# EAGLE board RT5350F_OLinuXino_Rev-A (EAGLE 4.16), part 1 of 2
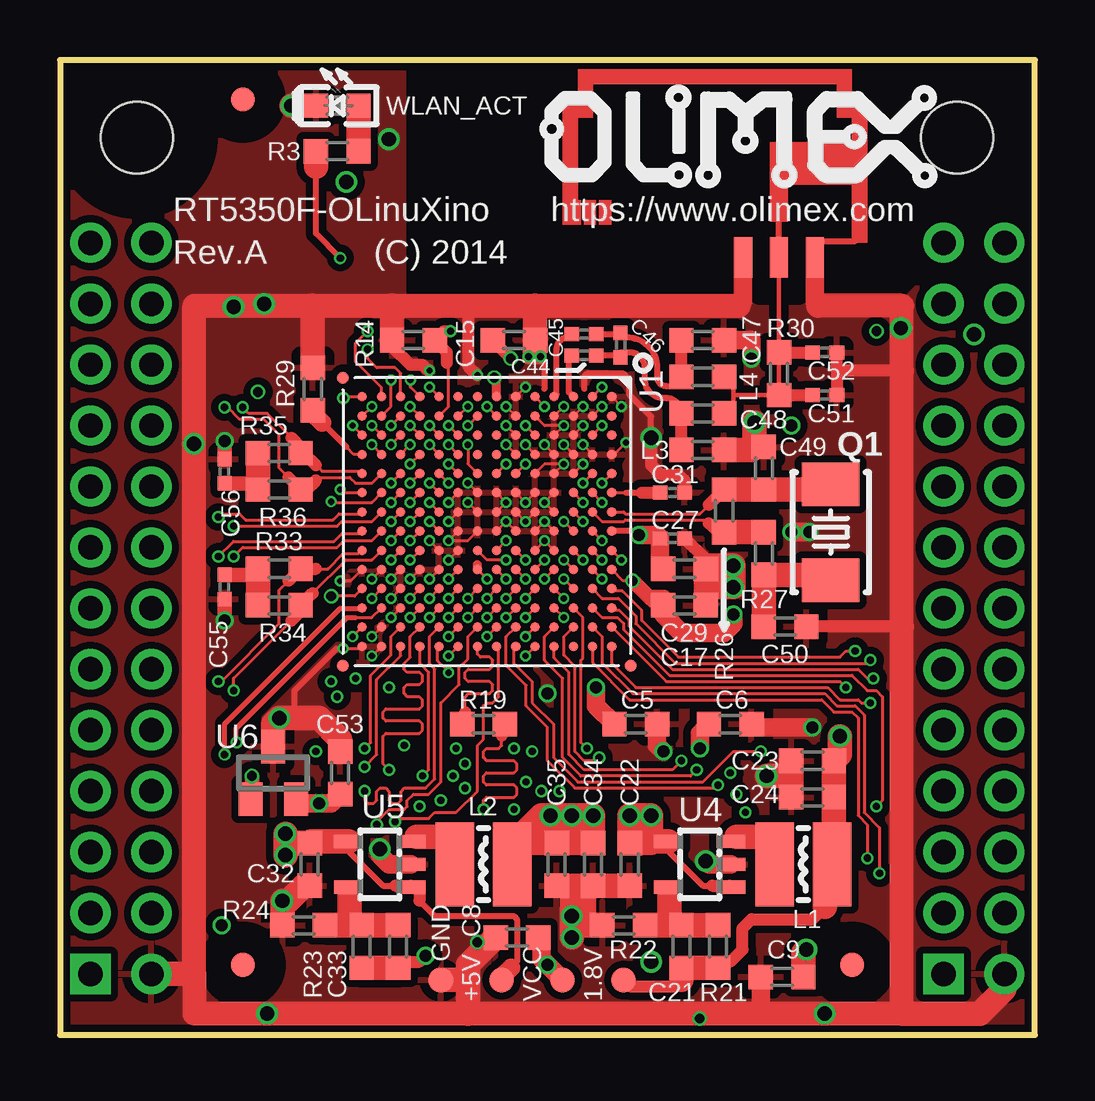
[diagram p0: board, top side]
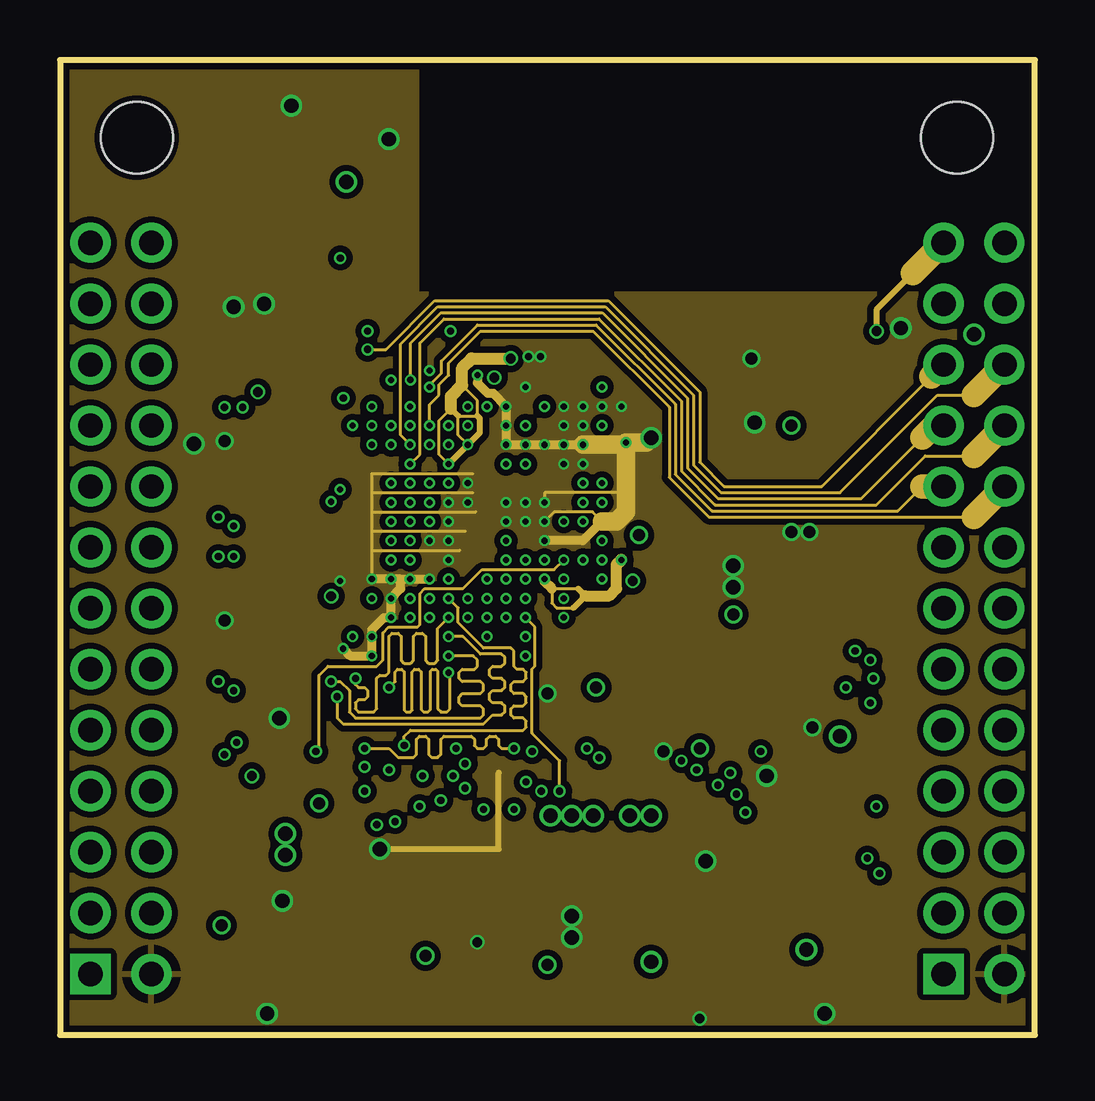
[diagram p1: board, inner layer GND]
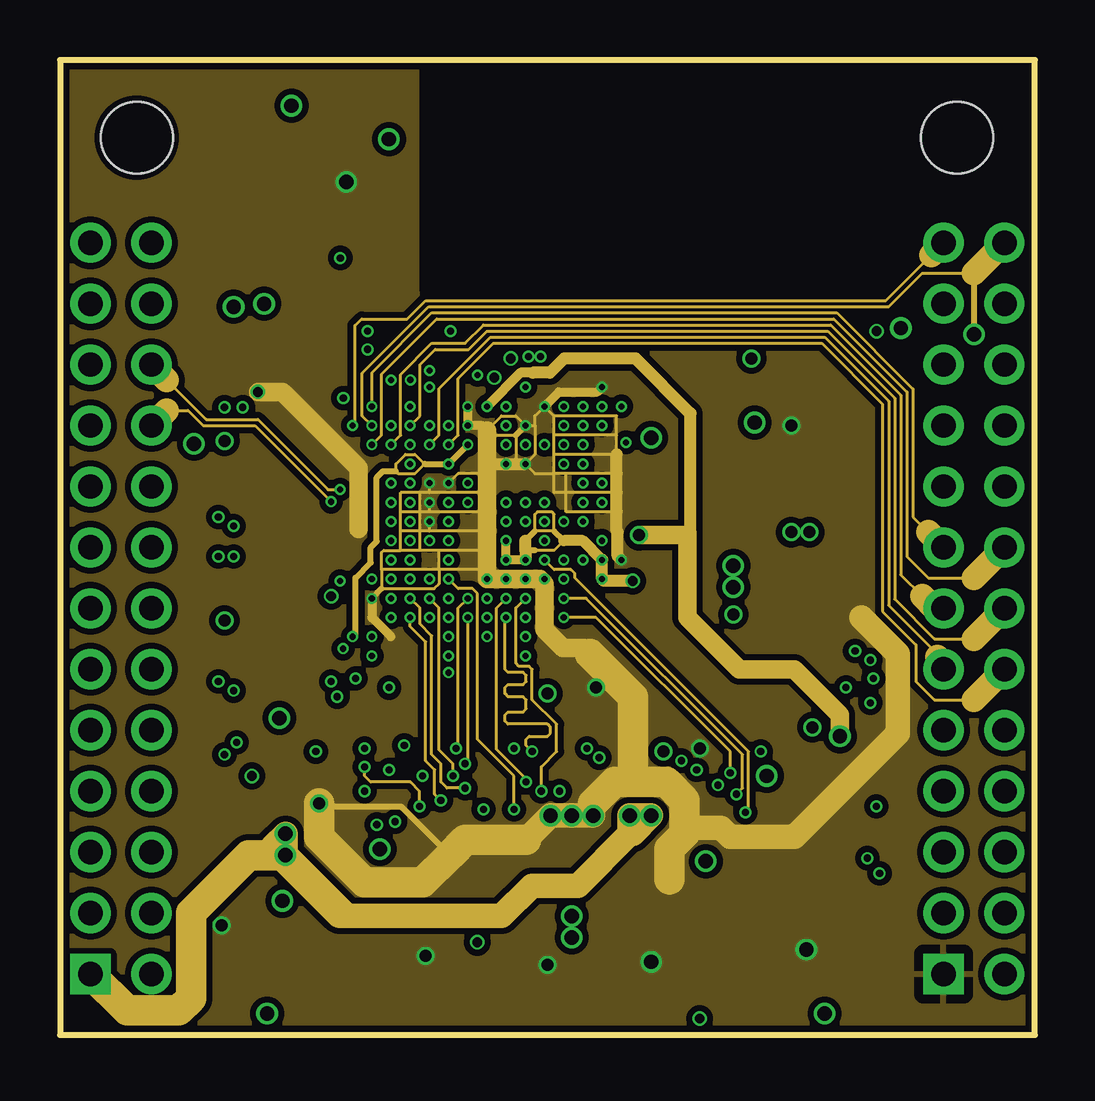
[diagram p2: board, inner layer PWR]
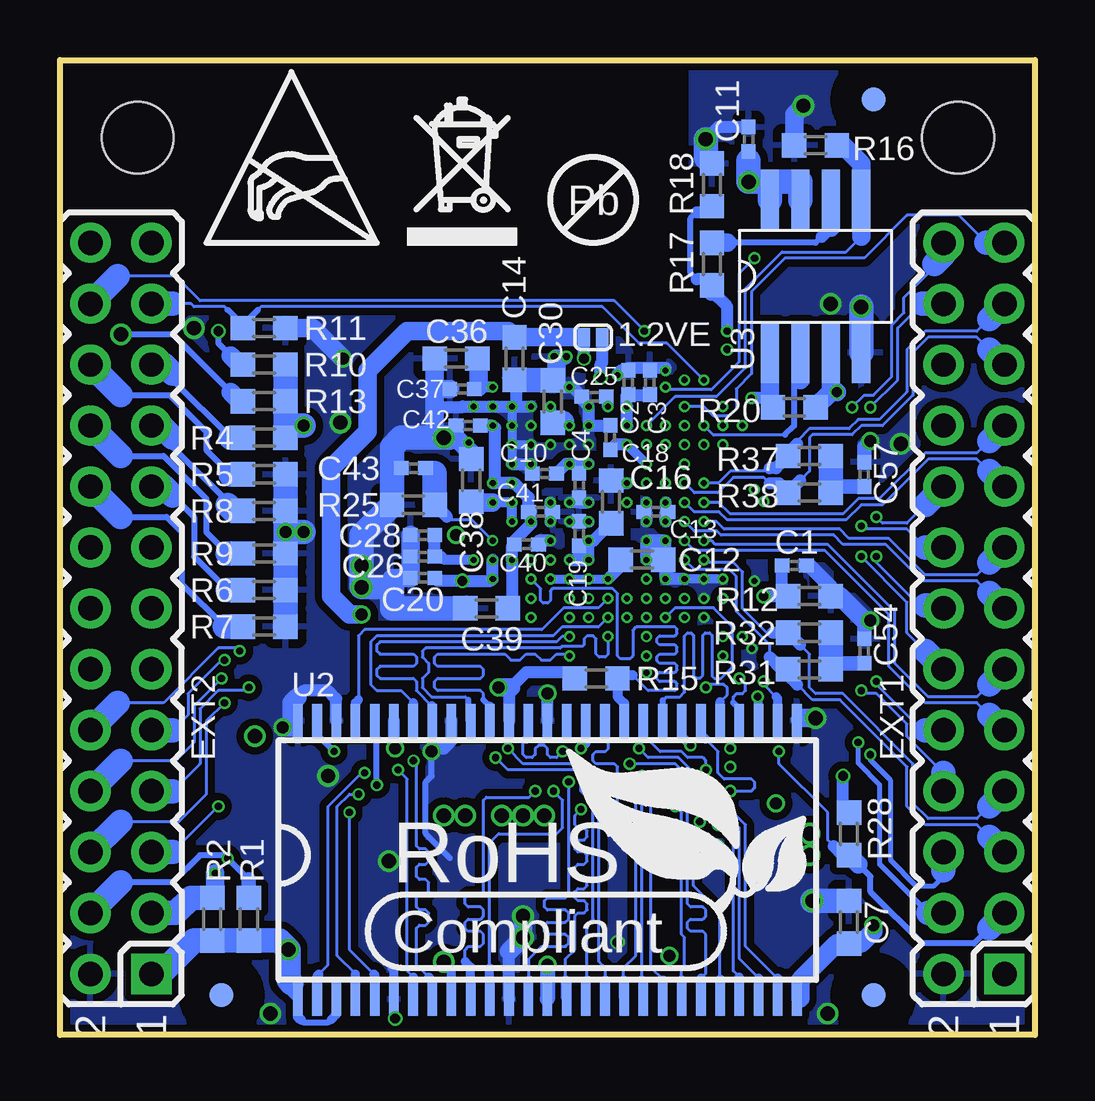
[diagram p3: board, bottom side, seen from below]

Size 40.64 x 40.64 mm. Coordinates in mm from the lower left corner, seen from the top.
Outline: 0,0 40.64,0 40.64,40.64 0,40.64 0,0
Copper layers (1+2*15+16): Top 0.035mm / dielectric 0.127mm / GND 0.035mm / dielectric 1.1mm / PWR 0.035mm / dielectric 0.127mm / Bottom 0.035mm
Design rules "default": minimum track width 4mil, minimum drill 0.25mm, track to track 5mil, track to pad 5mil, pad to pad 5mil, via to via 5mil, smd to smd 1mil, copper to edge 10mil, drill to drill 8mil, minimum pad ring 6mil, minimum via ring 4mil, stop-mask expansion 4mil, vias tented up to drill 28mil, thermal gap 15mil
Holes 3 mm at 3.2,37.4 37.4,37.4
tRestrict: area 34.4,34.4 to 40.4,40.4; area 0.2,34.4 to 6.2,40.4; 5 lines
bRestrict: area 0.2,34.4 to 6.2,40.4; area 34.4,34.4 to 40.4,40.4; 6 lines

## Footprints (pad centres in the part's own frame; a part is rotated, then mirrored left to right if it is on the bottom)
SJ_1_SMALLER = smd 0.508 x 0.762: 1 -0.381,0; 2 0.381,0
TESTPAD_40-ROUND = smd 1.016 x 1.016: 1 0,0
WIFI_RTL8188_ANT = smd 1.676 x 0.762: ANT -3.404,0; GND1 -3.404,1.499; GND2 -3.404,-1.499
C0402_TI = smd 0.61 x 0.584: 1 -0.508,0; 2 0.508,0
C0603_DWS@1 = smd 1.016 x 1.016: 1 -0.889,0; 2 0.889,0
C0603_DWS = smd 1.016 x 1.016: 1 -0.889,0; 2 0.889,0
HN2X13-MALE = drill 1.016 pad 1.676 square: 1 -15.24,-1.27 | drill 1.016 pad 1.676 round: 2 -15.24,1.27; 3 -12.7,-1.27; 4 -12.7,1.27; 5 -10.16,-1.27; 6 -10.16,1.27; 7 -7.62,-1.27; 8 -7.62,1.27; 9 -5.08,-1.27; 10 -5.08,1.27; 11 -2.54,-1.27; 12 -2.54,1.27; 13 0,-1.27; 14 0,1.27; 15 2.54,-1.27; 16 2.54,1.27; 17 5.08,-1.27; 18 5.08,1.27; 19 7.62,-1.27; 20 7.62,1.27; 21 10.16,-1.27; 22 10.16,1.27; 23 12.7,-1.27; 24 12.7,1.27; 25 15.24,-1.27; 26 15.24,1.27
FIDUCIAL-1X3 = smd 1 x 1: 1 0,0
CD32 = smd 1.6 x 3.5: 1 -1.2,0; 2 1.2,0
L0603_5MIL_DWS = smd 1.016 x 1.016: 1 -0.889,0; 2 0.889,0
HCX-4S = smd 1.8 x 2.4: 1 -2,0; 2 2,0
R0603_5MIL_DWS = smd 1.016 x 1.016: 1 -0.889,0; 2 0.889,0
TFBGA196B = smd 0.4 x 0.4: A1 -5.2,-5.2; A2 -5.2,-4.4; A3 -5.2,-3.6; A4 -5.2,-2.8; A5 -5.2,-2; A6 -5.2,-1.2; A7 -5.2,-0.4; A8 -5.2,0.4; A9 -5.2,1.2; A10 -5.2,2; A11 -5.2,2.8; A12 -5.2,3.6; A13 -5.2,4.4; A14 -5.2,5.2; B1 -4.4,-5.2; B2 -4.4,-4.4; B3 -4.4,-3.6; B4 -4.4,-2.8; B5 -4.4,-2; B6 -4.4,-1.2; B7 -4.4,-0.4; B8 -4.4,0.4; B9 -4.4,1.2; B10 -4.4,2; B11 -4.4,2.8; B12 -4.4,3.6; B13 -4.4,4.4; B14 -4.4,5.2; C1 -3.6,-5.2; C2 -3.6,-4.4; C3 -3.6,-3.6; C4 -3.6,-2.8; C5 -3.6,-2; C6 -3.6,-1.2; C7 -3.6,-0.4; C8 -3.6,0.4; C9 -3.6,1.2; C10 -3.6,2; C11 -3.6,2.8; C12 -3.6,3.6; C13 -3.6,4.4; C14 -3.6,5.2; D1 -2.8,-5.2; D2 -2.8,-4.4; D3 -2.8,-3.6; D4 -2.8,-2.8; D5 -2.8,-2; D6 -2.8,-1.2; D7 -2.8,-0.4; D8 -2.8,0.4; D9 -2.8,1.2; D10 -2.8,2; D11 -2.8,2.8; D12 -2.8,3.6; D13 -2.8,4.4; D14 -2.8,5.2; E1 -2,-5.2; E2 -2,-4.4; E3 -2,-3.6; E4 -2,-2.8; E5 -2,-2; E6 -2,-1.2; E7 -2,-0.4; E8 -2,0.4; E9 -2,1.2; E10 -2,2; E11 -2,2.8; E12 -2,3.6; E13 -2,4.4; E14 -2,5.2; F1 -1.2,-5.2; F2 -1.2,-4.4; F3 -1.2,-3.6; F4 -1.2,-2.8; F5 -1.2,-2; F6 -1.2,-1.2; F7 -1.2,-0.4; F8 -1.2,0.4; F9 -1.2,1.2; F10 -1.2,2; F11 -1.2,2.8; F12 -1.2,3.6; F13 -1.2,4.4; F14 -1.2,5.2; G1 -0.4,-5.2; G2 -0.4,-4.4; G3 -0.4,-3.6; G4 -0.4,-2.8; G5 -0.4,-2; G6 -0.4,-1.2; G7 -0.4,-0.4; G8 -0.4,0.4; G9 -0.4,1.2; G10 -0.4,2; G11 -0.4,2.8; G12 -0.4,3.6; G13 -0.4,4.4; G14 -0.4,5.2; H1 0.4,-5.2; H2 0.4,-4.4; H3 0.4,-3.6; H4 0.4,-2.8; H5 0.4,-2; H6 0.4,-1.2; H7 0.4,-0.4; H8 0.4,0.4; H9 0.4,1.2; H10 0.4,2; H11 0.4,2.8; H12 0.4,3.6; H13 0.4,4.4; H14 0.4,5.2; J1 1.2,-5.2; J2 1.2,-4.4; J3 1.2,-3.6; J4 1.2,-2.8; J5 1.2,-2; J6 1.2,-1.2; J7 1.2,-0.4; J8 1.2,0.4; J9 1.2,1.2; J10 1.2,2; J11 1.2,2.8; J12 1.2,3.6; J13 1.2,4.4; J14 1.2,5.2; K1 2,-5.2; K2 2,-4.4; K3 2,-3.6; K4 2,-2.8; K5 2,-2; K6 2,-1.2; K7 2,-0.4; K8 2,0.4; K9 2,1.2; K10 2,2; K11 2,2.8; K12 2,3.6; K13 2,4.4; K14 2,5.2; L1 2.8,-5.2; L2 2.8,-4.4; L3 2.8,-3.6; L4 2.8,-2.8; L5 2.8,-2; L6 2.8,-1.2; L7 2.8,-0.4; L8 2.8,0.4; L9 2.8,1.2; L10 2.8,2; L11 2.8,2.8; L12 2.8,3.6; L13 2.8,4.4; L14 2.8,5.2; M1 3.6,-5.2; M2 3.6,-4.4; M3 3.6,-3.6; M4 3.6,-2.8; M5 3.6,-2; M6 3.6,-1.2; M7 3.6,-0.4; M8 3.6,0.4; M9 3.6,1.2; M10 3.6,2; M11 3.6,2.8; M12 3.6,3.6; M13 3.6,4.4; M14 3.6,5.2; N1 4.4,-5.2; N2 4.4,-4.4; N3 4.4,-3.6; N4 4.4,-2.8; N5 4.4,-2; N6 4.4,-1.2; N7 4.4,-0.4; N8 4.4,0.4; N9 4.4,1.2; N10 4.4,2; N11 4.4,2.8; N12 4.4,3.6; N13 4.4,4.4; N14 4.4,5.2; P1 5.2,-5.2; P2 5.2,-4.4; P3 5.2,-3.6; P4 5.2,-2.8; P5 5.2,-2; P6 5.2,-1.2; P7 5.2,-0.4; P8 5.2,0.4; P9 5.2,1.2; P10 5.2,2; P11 5.2,2.8; P12 5.2,3.6; P13 5.2,4.4; P14 5.2,5.2 | smd 0.5 x 0.5: FID1 6,-6; FID2 -6,6; FID3 6,6
54TSOPII = smd 0.4 x 1.4: 1 -10.4,-6; 2 -9.6,-6; 3 -8.8,-6; 4 -8,-6; 5 -7.2,-6; 6 -6.4,-6; 7 -5.6,-6; 8 -4.8,-6; 9 -4,-6; 10 -3.2,-6; 11 -2.4,-6; 12 -1.6,-6; 13 -0.8,-6; 14 0,-6; 15 0.8,-6; 16 1.6,-6; 17 2.4,-6; 18 3.2,-6; 19 4,-6; 20 4.8,-6; 21 5.6,-6; 22 6.4,-6; 23 7.2,-6; 24 8,-6; 25 8.8,-6; 26 9.6,-6; 27 10.4,-6; 28 10.4,5.6; 29 9.6,5.6; 30 8.8,5.6; 31 8,5.6; 32 7.2,5.6; 33 6.4,5.6; 34 5.6,5.6; 35 4.8,5.6; 36 4,5.6; 37 3.2,5.6; 38 2.4,5.6; 39 1.6,5.6; 40 0.8,5.6; 41 0,5.6; 42 -0.8,5.6; 43 -1.6,5.6; 44 -2.4,5.6; 45 -3.2,5.6; 46 -4,5.6; 47 -4.8,5.6; 48 -5.6,5.6; 49 -6.4,5.6; 50 -7.2,5.6; 51 -8,5.6; 52 -8.8,5.6; 53 -9.6,5.6; 54 -10.4,5.6
SO8_ATMEL_FLASH = smd 0.762 x 2.54: 1 -1.905,-3.175; 2 -0.635,-3.175; 3 0.635,-3.175; 4 1.905,-3.175; 5 1.905,3.175; 6 0.635,3.175; 7 -0.635,3.175; 8 -1.905,3.175
SOT23-5 = smd 1.2 x 0.55: 1 1.3,-0.95; 2 1.3,0; 3 1.3,0.95; 4 -1.3,0.95; 5 -1.3,-0.95
SOT23 = smd 1 x 1.4: 1 -0.95,-1.1; 2 0.95,-1.1; 3 0,1.1
LED-0603 = smd 1.016 x 1.016: A 0.889,0; C -0.889,0

## Placement (x,y rotation side)
1.2VE  Close  [SJ_1_SMALLER]  18.41,29.08 0 bottom
1.8V  TESTPADTESTPAD_40-ROUND  [TESTPAD_40-ROUND]  23.5,2.29 270 top
+5V  TESTPADTESTPAD_40-ROUND  [TESTPAD_40-ROUND]  18.41,2.29 180 top
ANT  WIFI_RTL8188_ANTENNA  [WIFI_RTL8188_ANT]  29.97,35.81 90 top
C1  100nF  [C0402_TI]  10.03,19.57 0 bottom
C2  100nF  [C0402_TI]  16.95,27.2 90 bottom
C3  100nF  [C0402_TI]  16.05,27.2 90 bottom
C4  100nF  [C0402_TI]  19,22.9 270 bottom
C5  100nF  [C0603_DWS@1]  24,12.95 0 top
C6  100nF  [C0603_DWS@1]  27.94,12.95 0 top
C7  100nF  [C0603_DWS@1]  7.75,4.7 90 bottom
C8  100nF  [C0603_DWS@1]  19.05,4.06 180 top
C9  22uF/6.3V  [C0603_DWS@1]  30.1,2.41 180 top
C10  100nF  [C0402_TI]  20.45,23.4 180 bottom
C11  NA(100nF)  [C0402_TI]  11.94,37.34 90 bottom
C12  1uF  [C0603_DWS@1]  16.38,19.81 0 bottom
C13  100nF  [C0402_TI]  15.8,21.8 180 bottom
C14  1uF  [C0603_DWS]  21.69,28.19 270 bottom
C15  1uF  [C0603_DWS@1]  18.92,28.96 0 top
C16  1uF  [C0603_DWS@1]  17.66,22.22 90 bottom
C17  1uF  [C0603_DWS@1]  26.04,17.91 0 top
C18  100nF  [C0402_TI]  17.7,24.9 90 bottom
C19  100nF  [C0402_TI]  19,20.9 90 bottom
C20  100nF  [C0402_TI]  25.53,19.05 180 bottom
C21  22pF  [C0603_DWS@1]  25.91,3.68 90 top
C22  22uF/6.3V  [C0603_DWS@1]  23.75,7.11 270 top
C23  22uF/6.3V  [C0603_DWS@1]  31.37,11.43 180 top
C24  22uF/6.3V  [C0603_DWS@1]  31.37,9.91 180 top
C25  100nF  [C0402_TI]  18.38,26.6 180 bottom
C26  100nF  [C0402_TI]  25.53,19.94 180 bottom
C27  100nF  [C0402_TI]  25.53,20.7 0 top
C28  10pF  [C0402_TI]  25.53,20.83 180 bottom
C29  1uF  [C0603_DWS@1]  26.04,19.43 0 top
C30  1uF  [C0603_DWS@1]  20.1,26.4 90 bottom
C31  22nF  [C0402_TI]  25.53,22.61 0 top
C32  22uF/6.3V  [C0603_DWS@1]  10.41,7.11 270 top
C33  22pF  [C0603_DWS@1]  14.1,3.68 90 top
C34  22uF/6.3V  [C0603_DWS@1]  22.23,7.11 270 top
C35  22uF/6.3V  [C0603_DWS@1]  20.7,7.11 270 top
C36  1uF  [C0603_DWS@1]  24.13,28.19 180 bottom
C37  10pF  [C0402_TI]  23.88,26.92 180 bottom
C38  1uF  [C0603_DWS@1]  23.5,23.11 90 bottom
C39  1uF  [C0603_DWS@1]  22.86,17.78 180 bottom
C40  100pF  [C0402_TI]  21.2,20.45 0 bottom
C41  10pF  [C0402_TI]  20.6,21.8 0 bottom
C42  100nF  [C0402_TI]  23.62,25.4 180 bottom
C43  100pF  [C0402_TI]  25.91,23.62 180 bottom
C44  2.7pF  [C0402_TI]  21.84,28.32 0 top
C45  2.7pF  [C0402_TI]  21.84,29.21 0 top
C46  1.5pF  [C0402_TI]  23.37,28.75 270 top
C47  1.2pF  [C0603_DWS@1]  26.8,28.96 0 top
C48  1.2pF  [C0603_DWS@1]  26.8,25.91 0 top
C49  NA(27pF)  [C0603_DWS@1]  29.34,23.62 90 top
C50  27pF  [C0603_DWS@1]  30.23,17.02 0 top
C51  NA  [C0402_TI]  31.88,26.67 0 top
C52  NA  [C0402_TI]  31.88,28.45 0 top
C53  100nF  [C0603_DWS@1]  11.68,10.92 90 top
C54  100nF  [C0402_TI]  7.11,16 90 bottom
C55  100nF  [C0402_TI]  6.86,18.67 270 top
C56  100nF  [C0402_TI]  6.86,23.5 90 top
C57  100nF  [C0402_TI]  7.11,23.37 90 bottom
EXT1  HN2x13  [HN2X13-MALE]  2.54,17.78 90 bottom
EXT2  HN2x13  [HN2X13-MALE]  38.1,17.78 90 bottom
FID1  FIDUCIAL  [FIDUCIAL-1X3]  7.62,38.99 90 top
FID2  FIDUCIAL  [FIDUCIAL-1X3]  33.02,2.92 90 top
FID3  FIDUCIAL  [FIDUCIAL-1X3]  7.62,2.92 90 top
FID4  FIDUCIAL  [FIDUCIAL-1X3]  6.73,38.99 270 bottom
FID5  FIDUCIAL  [FIDUCIAL-1X3]  33.91,1.65 270 bottom
FID6  FIDUCIAL  [FIDUCIAL-1X3]  6.73,1.65 270 bottom
GND  TESTPADTESTPAD_40-ROUND  [TESTPAD_40-ROUND]  15.88,2.29 270 top
L1  2.2uH/1.5A/DCR<0.1R/CD32  [CD32]  30.99,7.11 0 top
L2  2.2uH/1.5A/DCR<0.1R/CD32  [CD32]  17.65,7.11 0 top
L3  2.2nH  [L0603_5MIL_DWS]  26.8,24.38 0 top
L4  2.7nH  [L0603_5MIL_DWS]  26.8,27.43 0 top
Q1  E4SB20.000F20E15(20MHz/20pF/20ppm/5x3.2mm)  [HCX-4S]  32.13,20.95 90 top
R1  2.2k  [R0603_5MIL_DWS]  32.77,4.83 270 bottom
R2  2.2k  [R0603_5MIL_DWS]  34.29,4.83 270 bottom
R3  2.2k  [R0603_5MIL_DWS]  11.56,36.83 180 top
R4  4.7k  [R0603_5MIL_DWS]  32.13,24.89 0 bottom
R5  4.7k  [R0603_5MIL_DWS]  32.13,23.37 0 bottom
R6  4.7k  [R0603_5MIL_DWS]  32.13,18.54 0 bottom
R7  4.7k  [R0603_5MIL_DWS]  32.13,17.02 0 bottom
R8  4.7k  [R0603_5MIL_DWS]  32.13,21.84 0 bottom
R9  4.7k  [R0603_5MIL_DWS]  32.13,20.07 0 bottom
R10  4.7k  [R0603_5MIL_DWS]  32.13,27.94 0 bottom
R11  4.7k  [R0603_5MIL_DWS]  32.13,29.46 0 bottom
R12  8.2k/1%  [R0603_5MIL_DWS]  9.4,18.29 0 bottom
R13  4.7k  [R0603_5MIL_DWS]  32.13,26.42 0 bottom
R14  4.7k  [R0603_5MIL_DWS]  14.73,28.96 180 top
R15  4.7k  [R0603_5MIL_DWS]  18.29,14.86 0 bottom
R16  4.7k  [R0603_5MIL_DWS]  9.14,37.08 0 bottom
R17  22R  [R0603_5MIL_DWS]  13.46,32.13 270 bottom
R18  4.7k  [R0603_5MIL_DWS]  13.46,35.43 90 bottom
R19  22R  [R0603_5MIL_DWS]  17.65,12.95 0 top
R20  NA(47k)  [R0603_5MIL_DWS]  10.03,26.16 180 bottom
R21  5.62k/1%  [R0603_5MIL_DWS]  27.43,3.68 90 top
R22  2.74k/1%  [R0603_5MIL_DWS]  23.5,4.57 180 top
R23  4.99k/1%  [R0603_5MIL_DWS]  12.57,3.68 90 top
R24  1.1k/1%  [R0603_5MIL_DWS]  10.16,4.57 180 top
R25  12k/1%  [R0603_5MIL_DWS]  25.91,22.1 0 bottom
R26  NA(1M)  [R0603_5MIL_DWS]  27.69,21.84 270 top
R27  330R  [R0603_5MIL_DWS]  29.34,20.07 270 top
R28  22R  [R0603_5MIL_DWS]  7.75,8.38 90 bottom
R29  9.1k/1%  [R0603_5MIL_DWS]  10.54,26.92 90 top
R30  0R(Board_Mounted)  [R0603_5MIL_DWS]  29.97,27.56 270 top
R31  49.9/1%  [R0603_5MIL_DWS]  9.4,15.24 0 bottom
R32  49.9/1%  [R0603_5MIL_DWS]  9.4,16.76 0 bottom
R33  49.9/1%  [R0603_5MIL_DWS]  9.14,19.43 180 top
R34  49.9/1%  [R0603_5MIL_DWS]  9.14,17.91 180 top
R35  49.9/1%  [R0603_5MIL_DWS]  9.14,24.26 180 top
R36  49.9/1%  [R0603_5MIL_DWS]  9.14,22.73 180 top
R37  49.9/1%  [R0603_5MIL_DWS]  9.4,24.13 0 bottom
R38  49.9/1%  [R0603_5MIL_DWS]  9.4,22.61 0 bottom
U1  RT5350  [TFBGA196B]  17.8,21.4 180 top
U2  K4S561632C-TC/L75  [54TSOPII]  20.32,7.49 0 bottom
U3  EN25Q64-104HIP  [SO8_ATMEL_FLASH]  9.14,31.62 0 bottom
U4  SY8009AAAC(SOT23-5)  [SOT23-5]  26.67,7.11 0 top
U5  SY8009AAAC(SOT23-5)  [SOT23-5]  13.34,7.11 0 top
U6  MCP130T-300I/TT  [SOT23]  8.89,10.92 0 top
U$3  [PB_SMALL]  18.41,34.8 0 bottom
U$8  [RECYCLE_BIN1/8]  26.16,32.89 0 bottom
U$9  [ROHS]  26.8,3.43 0 bottom
U$10  [OLIMEX1_V]  37.72,35.18 0 top
U$11  [ESD_SYMBOL]  34.54,33.02 0 bottom
VCC  TESTPADTESTPAD_40-ROUND  [TESTPAD_40-ROUND]  20.95,2.29 270 top
WLAN_ACT  LED/Yellow/0603  [LED-0603]  11.56,38.73 0 top

## Library data of the parts
1.2VE = jumper
1.8V +5V GND U6 VCC = gogo
ANT L1 L2 = OLIMEX_DISCRET
C1-C57 L3 L4 R1-R38 = rcl
EXT1 EXT2 = con-harting-ml
FID1-FID6 = SparkFunEagle-6-6-07
Q1 = crystal
U1 U3-U5 = OLIMEX_IC
U2 = SIRRUS
U$3 U$8-U$11 = olimex_logo1
WLAN_ACT = DOUBLE-SIDE

## Nets
+5V: +5V.1 C22.1 C32.1 EXT1.1 U4.1 U4.4 U5.1 U5.4
A0: U1.G14 U2.23
A1: U1.H13 U2.24
A2: U1.H12 U2.25
A3: U1.H11 U2.26
A4: U1.J14 U2.29
A5: U1.J13 U2.30
A6: U1.J12 U2.31
A7: U1.K14 U2.32
A8: U1.K13 U2.33
A9: U1.J11 U2.34
A10: U1.L14 U2.22
A11: U1.K12 U2.35
A12: U1.L13 U2.36
BA0: U1.L12 U2.20
BA1: U1.M14 U2.21
CAS: U1.C12 U2.17
CS: U1.K11 U2.19
CTS_N: EXT2.11 U1.K4
D0: U1.E10 U2.5
D1: U1.D11 U2.4
D2: U1.D12 U2.2
D3: U1.D13 U2.7
D4: U1.D14 U2.8
D5: U1.E11 U2.11
D6: U1.F11 U2.13
D7: U1.E12 U2.10
D8: U1.F12 U2.42
D9: U1.E13 U2.47
D10: U1.E14 U2.44
D11: U1.G11 U2.51
D12: U1.G12 U2.48
D13: U1.F13 U2.50
D14: U1.G13 U2.45
D15: U1.F14 U2.53
DCD_N: EXT2.12 U1.J4
DQM0: U1.J10 U2.15
DQM1: U1.M13 U2.39
DSR_N: EXT2.14 U1.L3
DTR_N: EXT2.16 U1.N4
EJTAG_TCK: EXT2.8 U1.A12
EJTAG_TDI: EXT2.6 U1.A14
EJTAG_TDO: EXT2.9 U1.B11
EJTAG_TMS: EXT2.7 U1.A13
EJTAG_TRSTN: EXT2.10 U1.A11
EXT_LDO_1P2: U1.H3
GND: ANT.GND1 ANT.GND2 C1.2 C2.2 C3.2 C4.2 C5.2 C6.2 C7.2 C8.2 C9.2 C10.2 C11.2 C12.2 C13.2 C14.2 C15.2 C16.2 C17.2 C18.2 C19.2 C20.2 C22.2 C23.2 C24.2 C25.2 C26.2 C27.2 C28.2 C29.2 C30.2 C31.2 C32.2 C34.2 C35.2 C36.2 C37.2 C38.2 C39.2 C40.2 C41.2 C42.2 C43.2 C47.2 C49.2 C50.2 C51.2 C52.2 C53.2 C54.2 C55.2 C56.2 C57.2 EXT1.2 EXT2.2 GND.1 L3.2 R5.2 R6.2 R7.2 R8.2 R9.2 R11.2 R12.2 R14.2 R16.1 R18.2 R22.2 R24.2 R25.1 R29.2 U1.A1 U1.A4 U1.B2 U1.B4 U1.C2 U1.C3 U1.C4 U1.C5 U1.D2 U1.D3 U1.D4 U1.D5 U1.D6 U1.D7 U1.D8 U1.D9 U1.E2 U1.E4 U1.E5 U1.E6 U1.E7 U1.E8 U1.E9 U1.F1 U1.F2 U1.F3 U1.F4 U1.F6 U1.F7 U1.F8 U1.G6 U1.G7 U1.G8 U1.H6 U1.H7 U1.H8 U1.J6 U1.J7 U1.J8 U1.J9 U1.K9 U1.K10 U1.L10 U1.M10 U1.M11 U1.M12 U1.N10 U1.N13 U1.N14 U1.P10 U1.P14 U2.6 U2.12 U2.28 U2.41 U2.46 U2.52 U2.54 U3.4 U4.2 U5.2 U6.3 WLAN_ACT.C
GPIO0: EXT2.5 U1.B12
I2C_SCLK: EXT2.4 R1.1 U1.B14
I2C_SD: EXT2.3 R2.1 U1.B13
LINK0: EXT2.18 R7.1 U1.K3
LINK1: EXT2.19 R8.1 U1.L1
LINK2: EXT2.20 R9.1 U1.L4
LINK3: EXT2.21 R4.1 U1.M1
LINK4: EXT2.22 R5.1 U1.M4
N$1: R17.1 U3.6
N$2: C43.1 R25.2 U1.B8
N$3: C44.1 U1.C1
N$4: C45.1 U1.D1
N$5: C44.2 C46.2 C48.1 L3.1
N$6: C45.2 C46.1 C47.1 L4.1
N$7: ANT.ANT C48.2 C51.1 C52.1 L4.2 R30.1 R30.2
N$8: R26.2 R27.1 U1.B7
N$9: C50.1 Q1.1 R27.2
N$10: C49.1 Q1.2 R26.1 U1.A7
N$11: R29.1 U1.P4
N$12: C54.1 R31.2 R32.2
N$13: C55.1 R33.2 R34.2
N$14: C56.1 R35.2 R36.2
N$15: C57.1 R37.2 R38.2
N$16: 1.2VE.2 U1.G1
N$17: R28.2 U6.1
N$18: R19.1 U1.H14
N$19: R19.2 U2.38
N$23: L1.1 U4.3
N$24: C21.2 R21.2 R22.1 U4.5
N$27: R15.2 U1.C11 U2.37
N$35: R3.1 WLAN_ACT.A
N$57: C31.1 U1.A6
N$64: L2.1 U5.3
N$66: C33.2 R23.2 R24.1 U5.5
PLL_VCC_1V2: C38.1 U1.B6 U1.C6 U1.C7
PORSTN: EXT1.3 R28.1 U1.C10
PWR_1V2: 1.2VE.1 C14.1 C15.1 C16.1 C17.1 C18.1 C19.1 C20.1 U1.A10 U1.B9 U1.B10 U1.F9 U1.G9 U1.H5 U1.H9 U1.J5 U1.P13
RAS: U1.L11 U2.18
RF_VCC_1V2: C39.1 C40.1 C41.1 C42.1 U1.A5 U1.B3 U1.B5 U1.C8 U1.C9
RIN: EXT2.13 U1.M3
RTS_N: EXT2.15 U1.P2
RXD: EXT2.26 R13.1 U1.N3
RXIM0: EXT1.21 R38.1 U1.L5
RXIM1: EXT1.17 U1.L6
RXIM2: EXT1.16 U1.N7
RXIM3: EXT1.11 U1.M8
RXIM4: EXT1.8 R34.1 U1.N9
RXIP0: EXT1.23 R37.1 U1.M5
RXIP1: EXT1.19 U1.M6
RXIP2: EXT1.18 U1.P7
RXIP3: EXT1.9 U1.L8
RXIP4: EXT1.10 R33.1 U1.P9
SPI_CLK: R17.2 R18.1 U1.N1
SPI_CS0: R20.2 U1.P1 U3.1
SPI_CS1: EXT1.25 U1.L2
SPI_MISO: U1.M2 U3.2
SPI_MOSI: R16.2 U1.J3 U3.5
TXD: EXT2.24 R14.1 U1.K2
TXOM0: EXT1.24 R36.1 U1.N5
TXOM1: EXT1.20 U1.N6
TXOM2: EXT1.15 U1.M7
TXOM3: EXT1.12 U1.N8
TXOM4: EXT1.7 R32.1 U1.M9
TXOP0: EXT1.26 R35.1 U1.P5
TXOP1: EXT1.22 U1.P6
TXOP2: EXT1.13 U1.L7
TXOP3: EXT1.14 U1.P8
TXOP4: EXT1.5 R31.1 U1.L9
UART_RXD2: EXT2.25 R10.1 U1.P3
UART_TXD2: EXT2.23 R11.1 U1.N2
UPHY0_PADM: EXT1.4 U1.N12
UPHY0_PADP: EXT1.6 U1.P12
UPHY0_VRES: C1.1 R12.1 U1.P11
VCC: C2.1 C3.1 C4.1 C5.1 C6.1 C7.1 C8.1 C9.1 C10.1 C11.1 C12.1 C13.1 C26.1 C28.1 C30.1 C33.1 C34.1 C35.1 C36.1 C37.1 C53.1 EXT2.1 L2.2 R1.2 R2.2 R4.2 R10.2 R13.2 R15.1 R20.1 R23.1 U1.A9 U1.B1 U1.D10 U1.E1 U1.E3 U1.F5 U1.F10 U1.G5 U1.G10 U1.H2 U1.H10 U1.J2 U1.K5 U1.K6 U1.K7 U1.K8 U1.N11 U2.1 U2.3 U2.9 U2.14 U2.27 U2.43 U2.49 U3.3 U3.7 U3.8 U6.2 VCC.1
VPP: 1.8V.1 C21.1 C23.1 C24.1 C25.1 C27.1 C29.1 L1.2 R21.1 U1.A8 U1.G2
WE: U1.C13 U2.16
WLAN_LED: EXT2.17 R3.2 R6.1 U1.K1